# Altium PCB PMOD_Step.PcbDoc
Units mil, origin at the board's own origin, x right, y up, seen from the top; angles counter-clockwise.
Board outline 3150 x 1575 mil, 2 copper layers (Top Layer, Bottom Layer); 51 components, 35 nets, 140 pads, 14 vias.
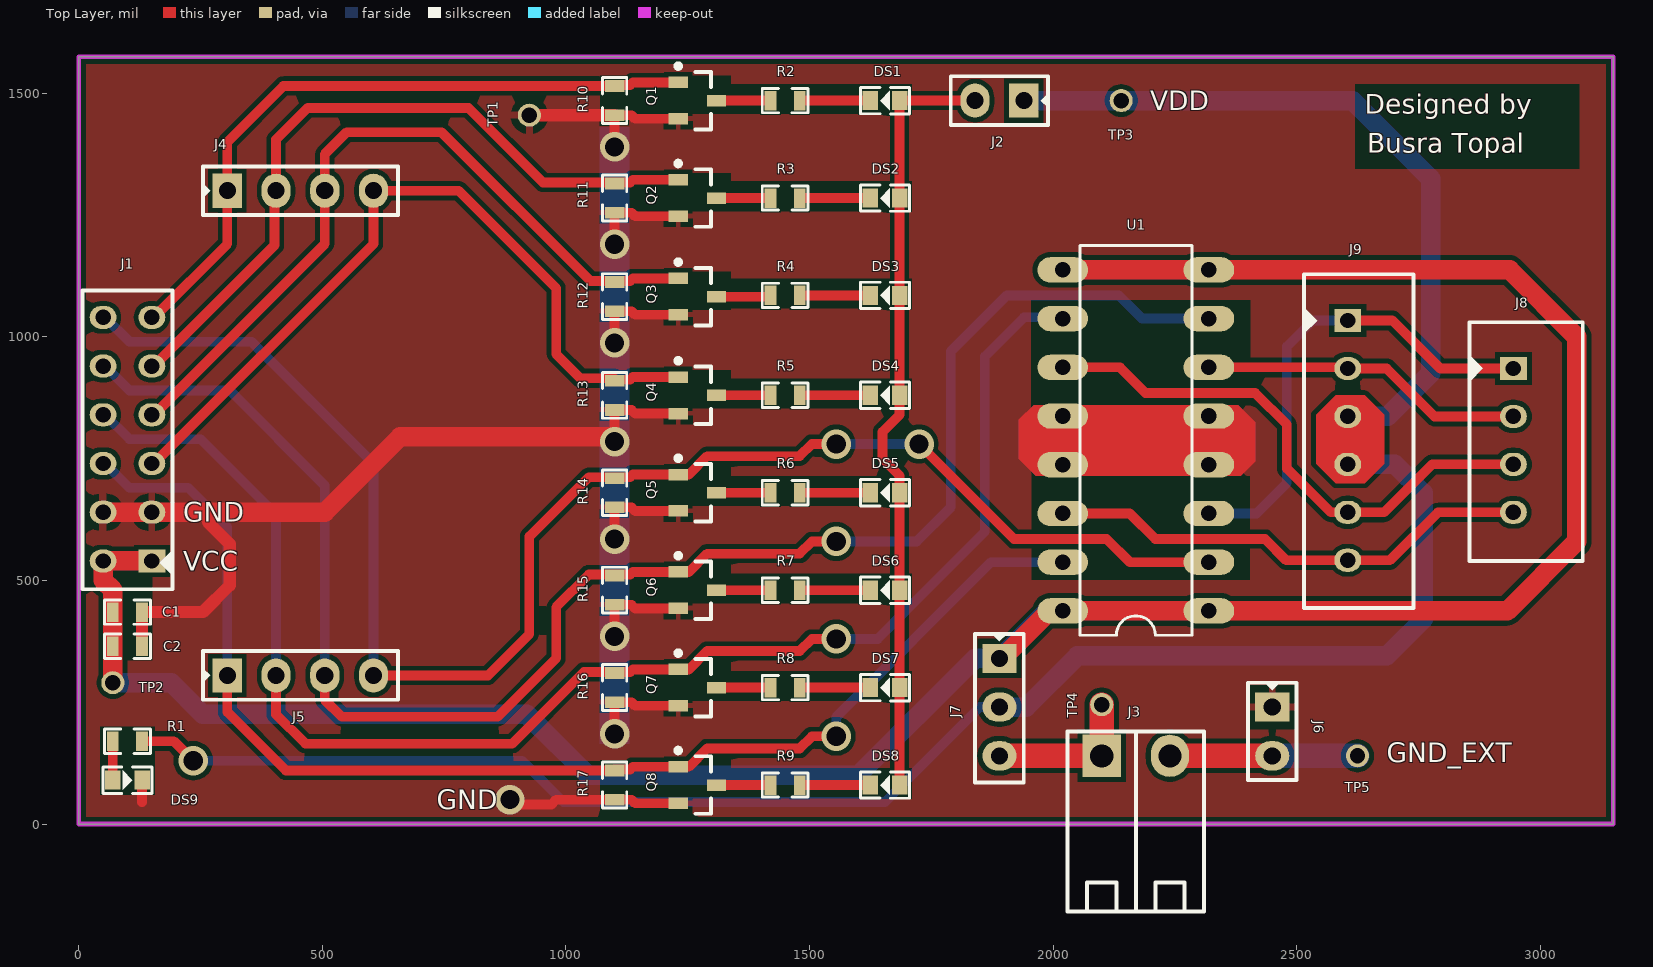
[diagram p0: Top Layer view]
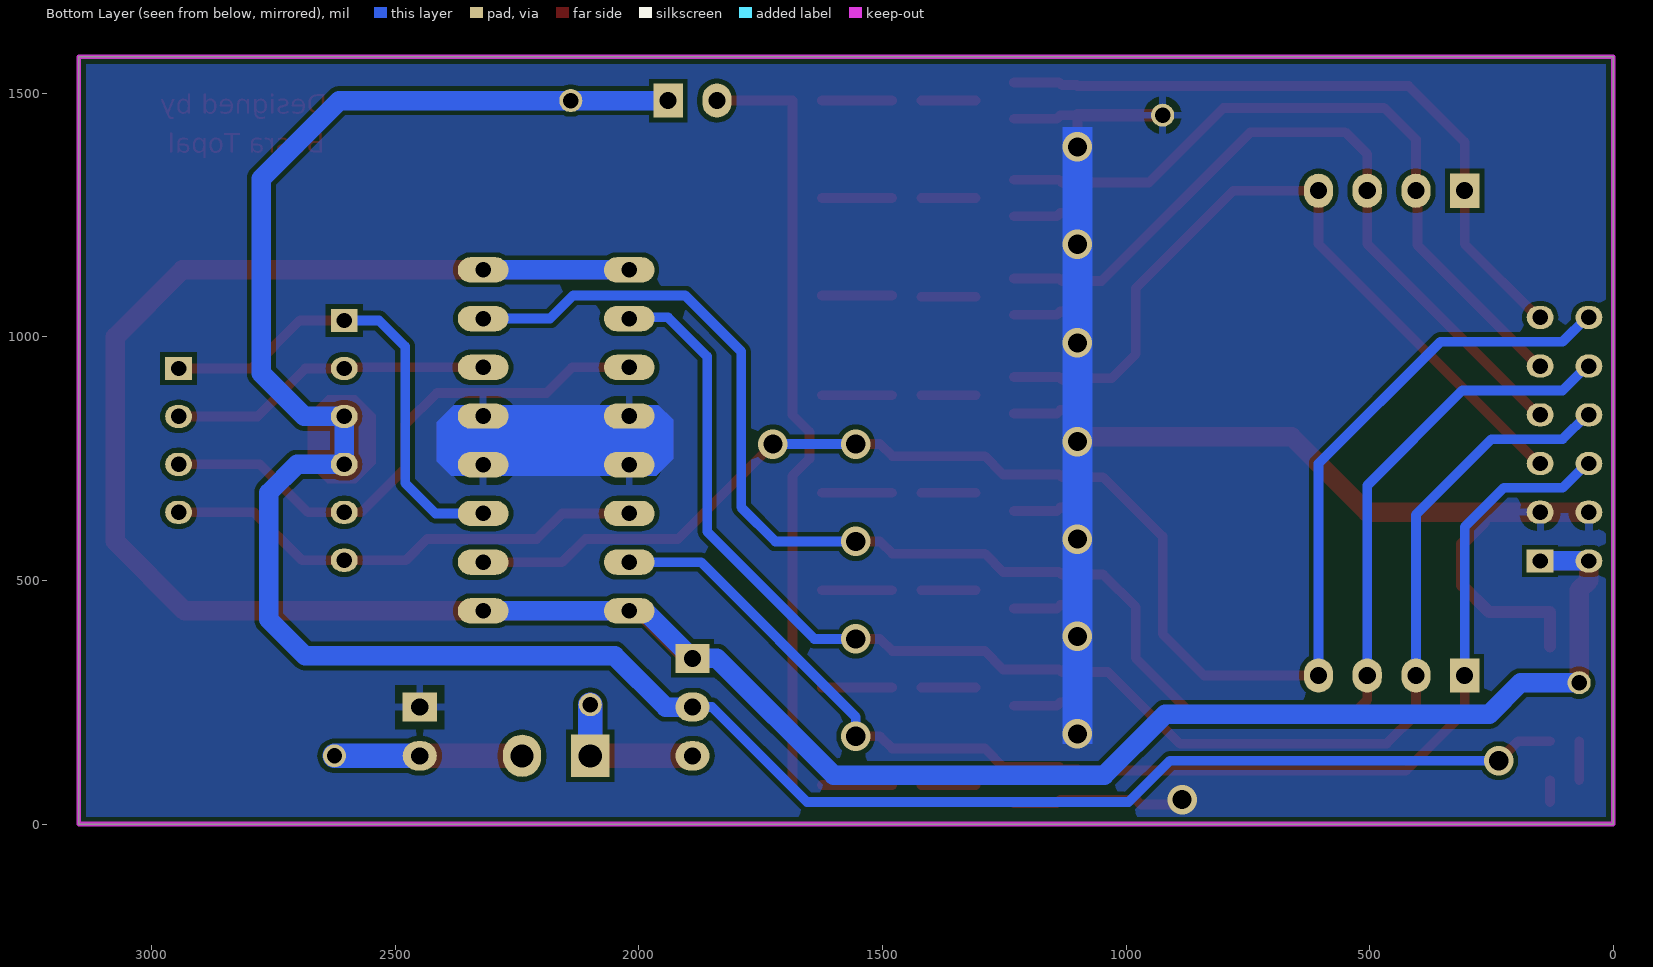
[diagram p1: Bottom Layer view, seen from below]
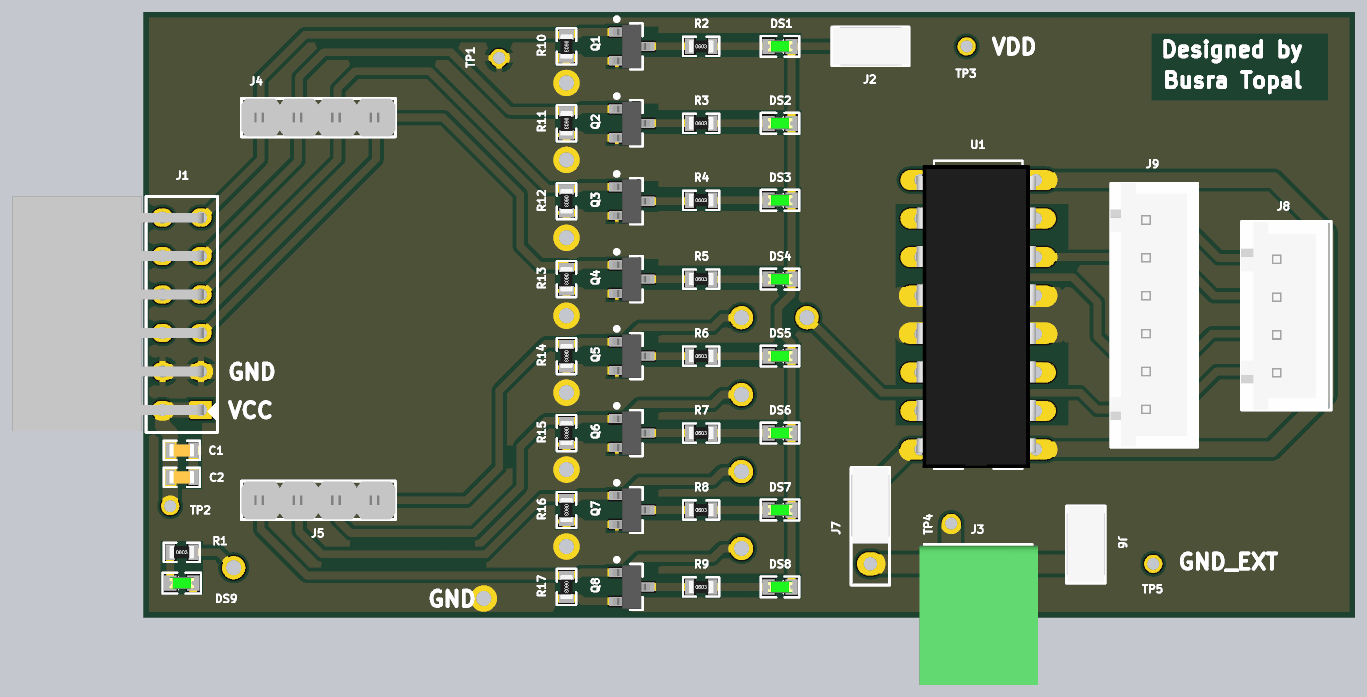
[diagram p2: 3D render of the assembled board from above, using the file's embedded part models]

## Layer stack, top to bottom
Top Solder: solder mask 0.4, Solder Resist, Dk 3.5
Top Layer: signal copper 1.4
Dielectric 1: dielectric 12.6, FR-4, Dk 4.8
Bottom Layer: signal copper 1.4
Bottom Solder: solder mask 0.4, Solder Resist, Dk 3.5

## Board outline
0,0 3150,0 3150,1575 0,1575

## Design rules (kind name [scope] priority, off if disabled: settings)
Clearance [All] p1: gap=10 ignorepadtopadclearanceinfootprint=FALSE except(0: Arc-Hole Track-Hole SMDPad-Hole THPad-Hole Via-Hole Fill-Hole Poly-Hole Region-Hole Text-Hole)
PolygonConnect [All] p1: thpad.connectstyle=Relief thpad.reliefconductorwidth=15 thpad.reliefentries=4 thpad.polygonreliefangle="90 Angle" thpad.airgapwidth=15 smdpad.connectstyle=Relief smdpad.reliefconductorwidth=10 smdpad.reliefentries=4 smdpad.polygonreliefangle="90 Angle" smdpad.airgapwidth=10 via.connectstyle=Direct via.reliefconductorwidth=10 via.reliefentries=4 via.polygonreliefangle="90 Angle" via.airgapwidth=10
RoutingVias [All] p1: holewidth=28 width=50 viastyle="Through Hole" minholewidth=28 minwidth=50 maxholewidth=78.74 maxwidth=100
SilkToSolderMaskClearance [IsPad] p1: minsilkscreentomaskgap=0 clearancetoexposedcopper=TRUE
SolderMaskExpansion [All] p1: expansion=4 istentingtop=FALSE
Width [All] p1: maxlimit=50 minlimit=10 preferedwidth=10 minimp=50.000000 maximp=50.000000 favimp=50.000000
29 further rules are at their usual default settings.

## Components (designator, comment, footprint, x,y, rotation, side; value= is the part's Value field where it differs from the comment)
C1 "CL10B104KB8NNNC" CAP-0603 100,435 r180 top value=100nF
C2 "CL10B103KB8NNNC" CAP-0603 100,365 r180 top value=10nF
DS1 "SMD Green Led" LED_SMD_0603G 1655,1485 r180 top value=LTST-C193KGKT-5A
DS2 "SMD Green Led" LED_SMD_0603G 1655,1285 r180 top value=LTST-C193KGKT-5A
DS3 "SMD Green Led" LED_SMD_0603G 1655,1085 r180 top value=LTST-C193KGKT-5A
DS4 "SMD Green Led" LED_SMD_0603G 1655,880 r180 top value=LTST-C193KGKT-5A
DS5 "SMD Green Led" LED_SMD_0603G 1655,680 r180 top value=LTST-C193KGKT-5A
DS6 "SMD Green Led" LED_SMD_0603G 1655,480 r180 top value=LTST-C193KGKT-5A
DS7 "SMD Green Led" LED_SMD_0603G 1655,280 r180 top value=LTST-C193KGKT-5A
DS8 "SMD Green Led" LED_SMD_0603G 1655,80 r180 top value=LTST-C193KGKT-5A
DS9 "SMD Green Led" LED_SMD_0603G 100,90 r0 top value=LTST-C193KGKT-5A
J1 "A-BL254-DA-G12D" CON-PMOD-FEMALE-2X6 100,790 r90 top
J2 "2.54mm-Jumper" CON-JUMPER-2.54-2L 1940,1485 r180 top
J3 "15EDGRC-3.5/2P" 15EDGRC-3.5-2 2030,-180 r0 top
J4 "2.54mm-STD-M-1x4" CON-HDR-M-2.54-1x4 305,1300 r0 top
J5 "2.54mm-STD-M-1x4" CON-HDR-M-2.54-1x4 305,305 r0 top
J6 "2.54mm-Jumper" CON-JUMPER-2.54-2L 2450,240 r270 top
J7 "2.54mm-Jumper" CON-JUMPER-2.54-3L 1890,340 r270 top
J8 "L-KLS1-XL5-2.50-04-R1" CON-JST-XH-2.50-4PIN 2945,787.5 r270 top
J9 "L-KLS1-XL5-2.50-06-R1" CON-JST-XH-2.50-6PIN 2605,787.5 r270 top
Q1 "2N7002K" SOT23_L 1270,1485 r0 top value=IRLML2502
Q2 "2N7002K" SOT23_L 1270,1285 r0 top value=IRLML2502
Q3 "2N7002K" SOT23_L 1270,1082.6 r0 top value=IRLML2502
Q4 "2N7002K" SOT23_L 1270,880 r0 top value=IRLML2502
Q5 "2N7002K" SOT23_L 1270,680 r0 top value=IRLML2502
Q6 "2N7002K" SOT23_L 1270,480 r0 top value=IRLML2502
Q7 "2N7002K" SOT23_L 1270,280 r0 top value=IRLML2502
Q8 "2N7002K" SOT23_L 1270,80 r0 top value=IRLML2502
R1 "RC0603FR-131K5L" RES-0603 100,170 r0 top value=1K5
R2 "RC0603FR-131K5L" RES-0603 1450,1485 r0 top value=1K5
R3 "RC0603FR-131K5L" RES-0603 1450,1285 r0 top value=1K5
R4 "RC0603FR-131K5L" RES-0603 1450,1085 r0 top value=1K5
R5 "RC0603FR-131K5L" RES-0603 1450,880 r0 top value=1K5
R6 "RC0603FR-131K5L" RES-0603 1450,680 r0 top value=1K5
R7 "RC0603FR-131K5L" RES-0603 1450,480 r0 top value=1K5
R8 "RC0603FR-131K5L" RES-0603 1450,280 r0 top value=1K5
R9 "RC0603FR-131K5L" RES-0603 1450,80 r0 top value=1K5
R10 "RC0603FR-1310KL" RES-0603 1100,1485 r270 top value=10K
R11 "RC0603FR-1310KL" RES-0603 1100,1285 r270 top value=10K
R12 "RC0603FR-1310KL" RES-0603 1100,1082.6 r270 top value=10K
R13 "RC0603FR-1310KL" RES-0603 1100,880 r270 top value=10K
R14 "RC0603FR-1310KL" RES-0603 1100,680 r270 top value=10K
R15 "RC0603FR-1310KL" RES-0603 1100,480 r270 top value=10K
R16 "RC0603FR-1310KL" RES-0603 1100,280 r270 top value=10K
R17 "RC0603FR-1310KL" RES-0603 1100,80 r270 top value=10K
TP1 "TP" TP_TH 925,1455 r180 top
TP2 "TP" TP_TH 70,290 r180 top
TP3 "TP" TP_TH 2140,1485 r180 top
TP4 "TP" TP_TH 2100,245 r180 top
TP5 "TP" TP_TH 2625,140 r90 top
U1 "L293D" PDIP-16 2170,787.5 r90 top

## Footprints (in the part's own frame and the unit in brackets; to place one, negate y for a bottom-side part, rotate by r counter-clockwise, add the part's x,y. Pads: shape width x height; smd on the part's side, far side on the other; paste and mask are expansions set on the pad)
15EDGRC-3.5-2 [mm] "Connector"
  rect 2x2.2 hole 1.2: 1(1.778,8.128)
  oval 2x2.2 hole 1.2: 2(5.334,8.128)
  silkscreen extent 0,0 7.11,9.4, body extent -0.31,0.13 7.49,9.33, height 7.2
CAP-0603 [mil]
  rect 24x40 smd: 1(-30,0) 2(30,0)
  silkscreen extent -47,-25 47,25, body extent -37,-16 37,16, height 32
CON-HDR-M-2.54-1x4 [mil] "Header; 2.54mm; Male; 1x4"
  rect 60x70 hole 35: 1(0,0)
  oval 60x70 hole 35: 2(100,0) 3(200,0) 4(300,0)
  silkscreen extent -50,-50 350,50, body extent -50,-49 350,49, height 370
CON-JST-XH-2.50-4PIN [mm] "Connector"
  rect 1.2x1.4 hole 0.8: 1(-3.75,0)
  oval 1.2x1.4 hole 0.8: 2(-1.25,0) 3(1.25,0) 4(3.75,0)
  silkscreen extent -6.16,-2.29 6.28,3.62, body extent -6.12,-2.32 6.28,3.43, height 7.25
CON-JST-XH-2.50-6PIN [mm] "Connector"
  rect 1.2x1.4 hole 0.8: 1(-6.25,0)
  oval 1.2x1.4 hole 0.8: 2(-3.75,0) 3(-1.25,0) 4(1.25,0) 5(3.75,0) 6(6.25,0)
  silkscreen extent -8.66,-2.29 8.74,3.43, body extent -8.7,-2.32 8.7,3.43, height 7.25
CON-JUMPER-2.54-2L [mil] "Jumper; Header; 2 Pos"
  rect 60x70 hole 35: 1(0,0)
  oval 60x70 hole 35: 2(100,0)
  silkscreen extent -50,-50 150,50, body extent -50,-50 147,50, height 374
CON-JUMPER-2.54-3L [mil] "Jumper; Header; 3 Pos"
  rect 60x70 hole 35: 1(0,0)
  oval 60x70 hole 35: 2(100,0) 3(200,0)
  silkscreen extent -50,-50 255,50, body extent -50,-50 147,50, height 374
CON-PMOD-FEMALE-2X6 [mm] "Connector"
  rect 1.2x1.4 hole 0.8: 1(-6.35,-1.27)
  oval 1.2x1.4 hole 0.8: 2(-6.35,1.27) 3(-3.81,-1.27) 4(-3.81,1.27) 5(-1.27,-1.27) 6(-1.27,1.27) 7(1.27,-1.27) 8(1.27,1.27) 9(3.81,-1.27) 10(3.81,1.27) 11(6.35,-1.27) 12(6.35,1.27)
  silkscreen extent -7.83,-2.38 7.75,2.35, body extent -7.75,-1.43 7.75,11.17, height 5.55
LED_SMD_0603G [mm] "Surface Mount 0603 Green LED"
  rect 0.8x1 smd: 1(-0.762,0) 2(0.762,0)
  silkscreen extent -1.27,-0.69 1.27,0.69, body extent -0.81,-0.4 0.81,0.4, height 0.6
PDIP-16 [mil] "SOIC, 16-Leads, Body 10,30x7,50mm, Pitch 1,27mm, IPC Medium Density"
  oval 52x104 hole 32: 1(-350,-150) 2(-250,-150) 3(-150,-150) 4(-50,-150) 5(50,-150) 6(150,-150) 7(250,-150) 8(350,-150) 9(350,150) 10(250,150) 11(150,150) 12(50,150) 13(-50,150) 14(-150,150) 15(-250,150) 16(-350,150)
  silkscreen extent -400,-115 400,115, body extent -399,-150 389,160, height 211
RES-0603 [mil]
  rect 24x40 smd: 1(-30,0) 2(30,0)
  silkscreen extent -47,-25 47,25, body extent -32,-16 31,16, height 17
SOT23_L [mm] "SOT23, 3-Leads, Body 2.9x1.3mm, Pitch 0.95mm, Lead Span 2.3mm, IPC High Density"
  rect 1x0.6 smd: 1(-1,0.95) 2(-1,-0.95) 3(1,0)
  silkscreen extent -1.12,-1.5 0.7,1.92, body extent -1.27,-1.46 1.21,1.46, height 0.98
TP_TH [mm] "Test point footprint"
  round 1.2 hole 0.8: 0(0,0)

## Part data
C1: library part CAP-100N-0603, "CAP CER 0.1UF 50V 10% X7R 0603", Capacitance=0.1µF, Manufacturer="Samsung Electro-Mechanics America, Inc", Operating Temperature="-55°C ~ 125°C", Package / Case="0603 (1608 Metric)", Ratings=-, Supplier Part Number 1=1276-1000-2-ND, Temperature Coefficient=X7R, Tolerance=±10%, Voltage - Rated=50V, Applications="General Purpose", Category=Capacitors, ComponentLink1Description=http://www.samsungsem.com/servlet/FileDownload?type=spec&file=CL10B104KB8NNNC.pdf, ComponentLink1URL=http://www.samsungsem.com/servlet/FileDownload?type=spec&file=CL10B104KB8NNNC.pdf, Features=-, Height - Seated (Max)=-, Lead Spacing=-, Lead Style=-, Manufacturer Part Number=CL10B104KB8NNNC, Mounting Type="Surface Mount, MLCC", Packaging="Tape & Reel (TR)", Pricing 1="4000=0.00513, 8000=0.00468, 12000=0.00446, 28000=0.00424, 100000=0.00307 (USD)", RoHS="RoHS Compliant", Size / Dimension="0.063\" L x 0.031\" W (1.60mm x 0.80mm)", Stock 1=9364000, Supplier 1=Digi-Key, Thickness (Max)="0.035\" (0.90mm)"
C2: library part CAP-10N-0603, "CAP CER 10000PF 50V 10% X7R 0603", Capacitance=10000pF, Manufacturer="Samsung Electro-Mechanics America, Inc", Operating Temperature="-55°C ~ 125°C", Package / Case="0603 (1608 Metric)", Ratings=-, Supplier Part Number 1=1276-1009-2-ND, Temperature Coefficient=X7R, Tolerance=±10%, Voltage - Rated=50V, Applications="General Purpose", Category=Capacitors, ComponentLink1Description=http://www.samsungsem.com/servlet/FileDownload?type=spec&file=CL10B103KB8NNNC.pdf, ComponentLink1URL=http://www.samsungsem.com/servlet/FileDownload?type=spec&file=CL10B103KB8NNNC.pdf, Features=-, Height - Seated (Max)=-, Lead Spacing=-, Lead Style=-, Manufacturer Part Number=CL10B103KB8NNNC, Mounting Type="Surface Mount, MLCC", Packaging="Tape & Reel (TR)", Pricing 1="4000=0.00345, 8000=0.00315, 12000=0.003, 28000=0.00285, 100000=0.00206 (USD)", RoHS="RoHS Compliant", Size / Dimension="0.063\" L x 0.031\" W (1.60mm x 0.80mm)", Stock 1=504000, Supplier 1=Digi-Key, Thickness (Max)="0.035\" (0.90mm)"
DS1 DS2 DS3 DS4 DS5 DS6 DS7 DS8 DS9: library part LED-SMD-GRN, "LED GREEN CLEAR 0603 SMD", Color=Green, Current - Test=5mA, Lens Color=Colorless, Manufacturer="Lite-On Inc.", Manufacturer Part Number=LTST-C193KGKT-5A, Millicandela Rating=16.25mcd, Package / Case="0603 (1608 Metric)", Supplier Part Number 1=160-1828-1-ND, Voltage - Forward (Vf) (Typ)=2V, Category=Optoelectronics, ComponentLink1Description=http://optoelectronics.liteon.com/upload/download/DS22-2007-0094/S_110_LTST-C193KGKT-5A.pdf, ComponentLink1URL=http://optoelectronics.liteon.com/upload/download/DS22-2007-0094/S_110_LTST-C193KGKT-5A.pdf, Features=-, Height (Max)=0.35mm, Lens Style/Size="Rectangle with Flat Top, 1.15mm x 0.80mm", Lens Transparency=Clear, Mounting Type="Surface Mount", Packaging="Cut Tape (CT)", Part Status=Active, Pricing 1="1=0.41, 10=0.296, 25=0.2268, 100=0.148, 250=0.10852, 500=0.0921, 1000=0.07565 (USD)", RoHS="RoHS Compliant", Size / Dimension="1.60mm L x 0.80mm W", Stock 1=108152, Supplier 1=Digi-Key, Viewing Angle=130°, Wavelength - Dominant=572nm, Wavelength - Peak=574nm
J1: library part CON-PMOD-FEMALE-2X6, "2.54mm Standart Female PMOD Connector 2x6", Color=White, Manufacturer=ASSMANN, Operating Temperature="-40°C ~ 115°C", Category="Connectors, Interconnects", ComponentLink1Description=https://www.cvilux.com/uploads/spec/100/483/SPCI028.pdf, ComponentLink1URL=https://www.cvilux.com/uploads/spec/100/483/SPCI028.pdf, Header Orientation=Vertical, Manufacturer Part Number=A-BL254-DA-G12D, Mounting Type="Through Hole", Number of Levels=1, Number of Positions=2, Packaging=Bulk, Part Status=Active, Pitch="0.049\" (1.25mm)", Positions Per Level=2, RoHS="RoHS Compliant", Termination Style=Solder, Type="Header, Male Pins, Shrouded"
J2 J6: library part CON-JUMPER-2.54-2L, "2.54mm Male Straight 1x2 standard Header", Color=White, Manufacturer=KLS, Operating Temperature="-40°C ~ 115°C", Category="Connectors, Interconnects", ComponentLink1Description=https://www.cvilux.com/uploads/spec/100/483/SPCI028.pdf, ComponentLink1URL=https://www.cvilux.com/uploads/spec/100/483/SPCI028.pdf, Header Orientation=Vertical, Manufacturer Part Number=2.54mm-Jumper, Mounting Type="Through Hole", Number of Levels=1, Number of Positions=2, Packaging=Bulk, Part Status=Active, Pitch=2.54mm, Positions Per Level=2, RoHS="RoHS Compliant", Termination Style=Solder, Type="Header, Male Pins, Shrouded"
J3: library part 15EDGRC-3.5-02P, "Pluggable terminal block; socket; male; angled 90°; 3.5mm; ways:2", Manufacturer="DEGSON ELECTRONICS", Rated current=7A, Category="Terminal blocks PCB mount", ComponentLink1Description=http://www.tme.eu/en/details/15edgrc-3.5_2p/terminal-blocks-pcb-mount/degson-electronics/, ComponentLink1URL=http://www.tme.eu/en/details/15edgrc-3.5_2p/terminal-blocks-pcb-mount/degson-electronics/, Connector=socket, Connector type="pluggable terminal block", Contacts pitch=3.5mm, Electrical mounting=THT, Manufacturer Part Number=15EDGRC-3.5/2P, MinAmount=2, Multiples=1, Number of ways=2, Price Type=NET, Pricing 1="2=0,327, 25=0,165, 100=0,124, 500=0,116, 2000=0,101 (USD)", Spatial orientation="angled 90°", Stock 1=0, SuppliedAmount=2000, Supplier 1=TME, Supplier Part Number 1=15EDGRC-3.5/2P, Unit=pcs, Weight=0,472
J4 J5: library part CON-HDR-M-2.54-1x4, "2.54mm Male Straight 1x2 standard Header", Color=White, Manufacturer=KLS, Operating Temperature="-40°C ~ 115°C", Category="Connectors, Interconnects", ComponentLink1Description=https://www.cvilux.com/uploads/spec/100/483/SPCI028.pdf, ComponentLink1URL=https://www.cvilux.com/uploads/spec/100/483/SPCI028.pdf, Header Orientation=Vertical, Manufacturer Part Number=2.54mm-STD-M-1x4, Mounting Type="Through Hole", Number of Levels=1, Number of Positions=4, Packaging=Bulk, Part Status=Active, Pitch=2.54mm, Positions Per Level=4, RoHS="RoHS Compliant", Termination Style=Solder, Type="Header, Male Pins, Shrouded"
J7: library part CON-JUMPER-2.54-3L, "2.54mm Male Straight 1x2 standard Header", Color=White, Manufacturer=KLS, Operating Temperature="-40°C ~ 115°C", Category="Connectors, Interconnects", ComponentLink1Description=https://www.cvilux.com/uploads/spec/100/483/SPCI028.pdf, ComponentLink1URL=https://www.cvilux.com/uploads/spec/100/483/SPCI028.pdf, Header Orientation=Vertical, Manufacturer Part Number=2.54mm-Jumper, Mounting Type="Through Hole", Number of Levels=1, Number of Positions=3, Packaging=Bulk, Part Status=Active, Pitch=2.54mm, Positions Per Level=3, RoHS="RoHS Compliant", Termination Style=Solder, Type="Header, Male Pins, Shrouded"
J8: library part CON-JST-XH-4PIN, "2.50mm JST-XH 4 Pin Male Connector", Color=White, Manufacturer="KLS Electronics", Operating Temperature="-40°C ~ 115°C", Category="Connectors, Interconnects", ComponentLink1Description=https://www.cvilux.com/uploads/spec/100/483/SPCI028.pdf, ComponentLink1URL=https://www.cvilux.com/uploads/spec/100/483/SPCI028.pdf, Header Orientation=Vertical, Manufacturer Part Number=L-KLS1-XL5-2.50-04-R1, Mounting Type="Through Hole", Number of Levels=1, Number of Positions=4, Packaging=Bulk, Part Status=Active, Pitch=2.50mm, Positions Per Level=4, RoHS="RoHS Compliant", Termination Style=Solder, Type="Header, Male Pins, Shrouded"
J9: library part CON-JST-XH-6PIN, "2.50mm JST-XH 6 Pin Male Connector", Color=White, Manufacturer="KLS Electronics", Operating Temperature="-40°C ~ 115°C", Category="Connectors, Interconnects", ComponentLink1Description=https://www.cvilux.com/uploads/spec/100/483/SPCI028.pdf, ComponentLink1URL=https://www.cvilux.com/uploads/spec/100/483/SPCI028.pdf, Header Orientation=Vertical, Manufacturer Part Number=L-KLS1-XL5-2.50-06-R1, Mounting Type="Through Hole", Number of Levels=1, Number of Positions=6, Packaging=Bulk, Part Status=Active, Pitch=2.50mm, Positions Per Level=6, RoHS="RoHS Compliant", Termination Style=Solder, Type="Header, Male Pins, Shrouded"
Q1 Q2 Q3 Q4 Q5 Q6 Q7 Q8: library part TRQ-IRLML2502, "MOSFET N-CH 20V 4.2A SOT23", Current - Continuous Drain (Id) @ 25°C="4.2A (Ta)", Drain to Source Voltage (Vdss)="20 V", Manufacturer="Infineon Technologies", Package / Case="TO-236-3, SC-59, SOT-23-3", Power - Max=350mW, Supplier Device Package=SOT-23, Supplier Part Number 1=9102981, Input Capacitance (Ciss) @ Vds="50pF @ 25V", Category="Discrete Semiconductor Products", ComponentLink1Description=http://www.fairchildsemi.com/ds/2N/2N7002K.pdf, ComponentLink1URL=http://www.fairchildsemi.com/ds/2N/2N7002K.pdf, FET Feature="Logic Level Gate", FET Type="MOSFET N-Channel, Metal Oxide", Gate Charge (Qg) @ Vgs="12 nC @ 5 V", Manufacturer Part Number=2N7002K, Mounting Type="Surface Mount", Packaging="Tape & Reel (TR)", Pricing 1="3000=0.046, 6000=0.04, 15000=0.034, 30000=0.032, 75000=0.03, 150000=0.026 (USD)", Rds On (Max) @ Id, Vgs="45mOhm @ 4.2A, 4.5V", RoHS="RoHS Compliant", Stock 1=36000, Supplier 1=Farnell, Vgs(th) (Max) @ Id="1.2V @ 250µA"
R1 R2 R3 R4 R5 R6 R7 R8 R9: library part RES-1K5-0603, "RES 1.5K OHM 1% 1/10W 0603", Manufacturer=YAGEO, Operating Temperature="-55°C ~ 155°C", Package / Case="0603 (1608 Metric)", Power (Watts)="0.1W, 1/10W", Resistance (Ohms)="1.5 kOhms", Supplier Device Package=0603, Temperature Coefficient=±200ppm/°C, Tolerance=±1%, Category=Resistors, ComponentLink1Description=http://www.vishay.com/docs/20043/crcwhpe3.pdf, ComponentLink1URL=http://www.vishay.com/docs/20043/crcwhpe3.pdf, Composition="Thick Film", Failure Rate=-, Features="Automotive AEC-Q200", Height - Seated (Max)="0.022\" (0.55mm)", Manufacturer Part Number=RC0603FR-131K5L, Number of Terminations=2, Packaging="Cut Tape (CT)", Part Status=Active, Pricing 1="1=0.23, 10=0.194, 25=0.1408, 50=0.102, 100=0.0757, 250=0.05808, 500=0.04576, 1000=0.03168, 2500=0.02904 (USD)", RoHS=-, Size / Dimension="0.063\" L x 0.031\" W (1.60mm x 0.80mm)", Stock 1=151894, Supplier 1=Avnet, Supplier Part Number 1=RC0603FR-131K5L
R10 R11 R12 R13 R14 R15 R16 R17: library part RES-10K-0603, "RES 10K OHM 1% 1/10W 0603", Manufacturer=YAGEO, Operating Temperature="-55°C ~ 155°C", Package / Case="0603 (1608 Metric)", Power (Watts)="0.1W, 1/10W", Resistance (Ohms)="10 kOhms", Supplier Device Package=0603, Supplier Part Number 1=4510020, Temperature Coefficient=±100ppm/°C, Tolerance=±1%, Category=Resistors, ComponentLink1Description=http://www.vishay.com/docs/20043/crcwhpe3.pdf, ComponentLink1URL=http://www.vishay.com/docs/20043/crcwhpe3.pdf, Composition="Thick Film", Failure Rate=-, Features=-, Height - Seated (Max)="0.022\" (0.55mm)", Manufacturer Part Number=RC0603FR-1310KL, Number of Terminations=2, Packaging="Cut Tape (CT)", Part Status=Active, Pricing 1="1=0.23, 10=0.194, 25=0.1408, 50=0.102, 100=0.0757, 250=0.05808, 500=0.04576, 1000=0.03168, 2500=0.02904 (USD)", RoHS=-, Size / Dimension="0.063\" L x 0.031\" W (1.60mm x 0.80mm)", Stock 1=151894, Supplier 1="Future Electronics"
TP1 TP2 TP3 TP4 TP5: "Test Point", ClassName="Test Points", Published=25-Oct-2009, Publisher=tmk
U1: library part IC-L293D-PDIP, "IC MTR DRV BIPOLR 4.5-36V 20SOIC", Supplier Part Number 1=511-L293D, Supplier 1=Mouser

## Via types
v1: diameter 60.63, hole 39.37, Top Layer to Bottom Layer, 14 vias

## Nets (pads, with @x,y where several pads share a name; then routed paths per layer and width w, separated by ;. In a path a pad name is that pad's centre, name@x,y a point inside that pad or via, vN(x,y) a via of type N, cw(c..) or ccw(c..) an arc to the next point about the centre after c; other vN are vias at no path point)
GND: C1.1 C2.1 DS9.2 J1.3 J1.4 J6.1 Q1.2 Q2.2 Q3.2 Q4.2 Q5.2 Q6.2 Q7.2 Q8.2 R10.2 R11.2 R12.2 R13.2 R14.2 R15.2 R16.2 R17.2 TP1.0 U1.4 U1.5 U1.12 U1.13 | length 3456.4
  Top Layer w20: 130,45 DS9.2 ; v1(885,50) 885,45 890,40 970,40 980,50 R17.2 1135,50 1142.4,42.6 Q8.2 ; v1@1100,195 R16.2 1135,250 1142.4,242.6 Q7.2 ; v1@1100,395 R15.2 1135,450 1142.4,442.6 Q6.2 ; v1@1100,595 R14.2 1135,650 1142.4,642.6 Q5.2 ; v1@1100,795 R13.2 1135,850 1142.4,842.6 Q4.2 ; v1@1100,997.6 R12.2 1135,1052.6 1142.4,1045.2 Q3.2 ; v1@1100,1200 R11.2 1135,1255 1142.4,1247.6 Q2.2 ; v1@1100,1400 R10.2 1135,1455 1142.4,1447.6 Q1.2
  Top Layer w25: C2.1 C1.1 255,435 310,490 310,575 265,620 265,640 ; TP1.0 R10.2
  Top Layer w40: J1.4 J1.3 265,640 505,640 660,795 v1@1100,795
  other v1: 1100,185 1100,385 1100,585 1100,785 1100,987.6 1100,1190 1100,1390
GND_EXT: J3.2 J6.2 TP5.0 | length 385
  Top Layer w50: J3.2 J6.2
  Bottom Layer w50: J6.2 TP5.0
mSig1: J8.1 J9.1 U1.3 | length 993.8
  Top Layer w20: J9.1 2696.44,1033.56 2794.86,935.14 J8.1
  Bottom Layer w20: U1.3 2417.5,637.5 2480,700 2480,980 2533.56,1033.56 J9.1
mSig2: J8.2 J9.2 U1.6 | length 666.7
  Top Layer w20: U1.6 2602.64,937.5 J9.2 2684.86,935.14 2783.29,836.71 J8.2
mSig3: J8.3 J9.5 U1.11 | length 1141.8
  Top Layer w20: U1.11 2137.5,937.5 2190,885 2415,885 2480,820 2480,730 2570.14,639.86 J9.5 2679.86,639.86 2778.29,738.29 J8.3
mSig4: J8.4 J9.6 U1.14 | length 1005.6
  Top Layer w20: U1.14 2157.5,637.5 2210,585 2435,585 2478.56,541.44 J9.6 2691.44,541.44 2789.86,639.86 J8.4
NetDS1_1: DS1.1 DS2.1 DS3.1 DS4.1 DS5.1 DS6.1 DS7.1 DS8.1 J2.2 | length 1589
  Top Layer w20: DS8.1 DS7.1 DS6.1 DS5.1 1685,715 1650,750 1650,805 1685,840 DS4.1 DS3.1 DS2.1 DS1.1 J2.2
NetDS1_2: DS1.2 R2.2 | length 145
  Top Layer w20: R2.2 DS1.2
NetDS2_2: DS2.2 R3.2 | length 145
  Top Layer w20: R3.2 DS2.2
NetDS3_2: DS3.2 R4.2 | length 145
  Top Layer w20: R4.2 DS3.2
NetDS4_2: DS4.2 R5.2 | length 145
  Top Layer w20: R5.2 DS4.2
NetDS5_2: DS5.2 R6.2 | length 145
  Top Layer w20: R6.2 DS5.2
NetDS6_2: DS6.2 R7.2 | length 145
  Top Layer w20: R7.2 DS6.2
NetDS7_2: DS7.2 R8.2 | length 145
  Top Layer w20: R8.2 DS7.2
NetDS8_2: DS8.2 R9.2 | length 145
  Top Layer w20: R9.2 DS8.2
NetDS9_1: DS9.1 R1.1 | length 80
  Top Layer w20: DS9.1 R1.1
NetQ1_3: Q1.3 R2.1 | length 110.6
  Top Layer w20: Q1.3 R2.1
NetQ2_3: Q2.3 R3.1 | length 110.6
  Top Layer w20: Q2.3 R3.1
NetQ3_3: Q3.3 R4.1 | length 110.6
  Top Layer w20: Q3.3 R4.1@1420,1082.6
NetQ4_3: Q4.3 R5.1 | length 110.6
  Top Layer w20: Q4.3 R5.1
NetQ5_3: Q5.3 R6.1 | length 110.6
  Top Layer w20: Q5.3 R6.1
NetQ6_3: Q6.3 R7.1 | length 110.6
  Top Layer w20: Q6.3 R7.1
NetQ7_3: Q7.3 R8.1 | length 110.6
  Top Layer w20: Q7.3 R8.1
NetQ8_3: Q8.3 R9.1 | length 110.6
  Top Layer w20: Q8.3 R9.1
Signal1: J1.11 J4.1 Q1.1 R10.1 | length 1402.8
  Top Layer w20: J1.11 153.94,1040 305,1191.06 J4.1 305,1400 420,1515 R10.1 1102,1517 1132,1517 1137.4,1522.4 Q1.1
Signal2: J1.9 J4.2 Q2.1 R11.1 | length 1491.1
  Top Layer w20: J1.9 153.94,940 401.97,1188.03 401.97,1296.97 J4.2 405,1405 470,1470 800,1470 953,1317 1100,1317 1132,1317 1137.4,1322.4 Q2.1
Signal3: J1.7 J4.3 Q3.1 R12.1 | length 1557.4
  Top Layer w20: J1.7 153.94,840 505,1191.06 J4.3 505,1375 550,1420 745,1420 1050.4,1114.6 1100,1114.6 1132,1114.6 1137.4,1120 Q3.1
Signal4: J1.5 J4.4 Q4.1 R13.1 | length 1618.4
  Top Layer w20: J1.5 153.94,740 605,1191.06 J4.4 780,1300 980,1100 980,965 1030,915 1099,915 1102,912 1132,912 1137.4,917.4 Q4.1
Signal5: J1.12 J5.4 Q5.1 R14.1 U1.2 | length 3243.6
  Top Layer w20: J5.4 840,305 925,390 925,590 1047,712 1100,712 1132,712 1137.4,717.4 Q5.1 1252.4,717.4 1290,755 1480,755 1505,780 v1(1555,780) ; v1(1725,780) 1920,585 2110,585 2157.5,537.5 U1.2
  Bottom Layer w20: J1.12 53.94,1040 103.94,990 355,990 605,740 J5.4 ; v1(1555,780) v1(1725,780)
Signal6: J1.10 J5.3 Q6.1 R15.1 U1.7 | length 3452.9
  Top Layer w20: J5.3 505,255 540,220 860,220 980,340 980,445 1047,512 1100,512 1132,512 1137.4,517.4 Q6.1 1252.4,517.4 1290,555 1480,555 1505,580 v1(1555,580)
  Bottom Layer w20: J1.10 53.94,940 103.94,890 310,890 505,695 J5.3 ; v1(1555,580) 1720,580 1790,650 1790,970 1905,1085 2135,1085 2182.5,1037.5 U1.7
Signal7: J1.8 J5.2 Q7.1 R16.1 U1.10 | length 3064.1
  Top Layer w20: J5.2 405,225 465,165 890,165 1037,312 1100,312 1132,312 1137.4,317.4 Q7.1 1252.4,317.4 1290,355 1480,355 1505,380 v1(1555,380)
  Bottom Layer w20: J1.8 53.94,840 103.94,790 250,790 405,635 J5.2 ; v1(1555,380) 1640,380 1860,600 1860,960 1940,1040 2017.5,1040 U1.10
Signal8: J1.6 J5.1 Q8.1 R17.1 U1.15 | length 2653.2
  Top Layer w20: J5.1 305,230 425,110 R17.1 ; R17.1@1100,112 1132,112 1137.4,117.4 Q8.1 1252.4,117.4 1290,155 1480,155 1505,180 v1(1555,180)
  Bottom Layer w20: J1.6 53.94,740 103.94,690 225,690 305,610 J5.1 ; v1(1555,180) 1555,220 1872.5,537.5 U1.15
V_EXT: J3.1 J7.3 TP4.0 | length 420
  Top Layer w50: J7.3 J3.1 TP4.0
  Bottom Layer w50: J3.1 TP4.0
VCC: C1.2 C2.2 J1.1 J1.2 J7.1 TP2.0 U1.1 U1.8 U1.9 U1.16 | length 6043.1
  Top Layer w40: TP2.0 C2.2 C1.2 70,480 50,500 J1.2 J1.1 ; J7.1 1895,340 1992.5,437.5 U1.16 U1.1 2932.5,437.5 3075,580 3075,1000 2937.5,1137.5 U1.8 U1.9
  Bottom Layer w40: J1.2 J1.1 ; TP2.0 190,290 255,225 920,225 1045,100 1600,100 1840,340 J7.1 1987.5,437.5 U1.16 U1.1 ; U1.9 U1.8
VDD: J2.1 J7.2 J9.3 J9.4 R1.2 TP3.0 | length 4882.5
  Top Layer w20: R1.2 195,170 v1(235,130)
  Bottom Layer w20: v1(235,130) 910,130 995,45 1655,45 1850,240 J7.2
  Bottom Layer w40: J7.2 1945,240 2050,345 2685,345 2760,420 2760,680 2701.71,738.29 J9.4 J9.3 2686.71,836.71 2775,925 2775,1325 2615,1485 J2.1

## Polygon pours and split planes (outlines as drawn)
GND on Bottom Layer "GND_TopLayer" (solid, remove dead copper, pour order 0): 0,0 3150,0 3150,1575 0,1575
GND on Top Layer "GND_TopLayer" (solid, remove dead copper, pour order 1): 0,0 3150,0 3150,1575 0,1575

## Keep-outs
Keep-Out Layer:
  the board outline again, w10

## Other copper
Top Layer:
  pour cut-out: 1339.06,52.32 1710.75,52.32 1710.75,115 1339.06,115
  pour cut-out: 1339.06,252.32 1710.75,252.32 1710.75,315 1339.06,315
  pour cut-out: 1339.06,452.32 1710.75,452.32 1710.75,515 1339.06,515
  pour cut-out: 1339.06,652.32 1710.75,652.32 1710.75,715 1339.06,715
  pour cut-out: 1339.06,852.32 1710.75,852.32 1710.75,915 1339.06,915
  pour cut-out: 1339.06,1057.32 1710.75,1057.32 1710.75,1120 1339.06,1120
  pour cut-out: 1339.06,1257.32 1710.75,1257.32 1710.75,1320 1339.06,1320
  pour cut-out: 1339.06,1457.32 1710.75,1457.32 1710.75,1520 1339.06,1520
  pour cut-out: 1070,132.1 1070,60 1120,60 1120,40 1165,40 1165,52.32 1339.06,52.32 1339.06,132.1
  pour cut-out: 1070,332.1 1070,260 1120,260 1120,240 1165,240 1165,252.32 1339.06,252.32 1339.06,332.1
  pour cut-out: 1070,532.1 1070,460 1120,460 1120,440 1165,440 1165,452.32 1339.06,452.32 1339.06,532.1
  pour cut-out: 1070,732.1 1070,660 1120,660 1120,640 1165,640 1165,652.32 1339.06,652.32 1339.06,732.1
  pour cut-out: 1070,932.1 1070,860 1120,860 1120,840 1165,840 1165,852.32 1339.06,852.32 1339.06,932.1
  pour cut-out: 1070,1134.69 1070,1062.6 1120,1062.6 1120,1042.6 1165,1042.6 1165,1054.92 1339.06,1054.92 1339.06,1134.69
  pour cut-out: 1070,1337 1070,1265 1120,1265 1120,1245 1165,1245 1165,1257.32 1339.06,1257.32 1339.06,1337
  pour cut-out: 1070,1537.1 1070,1465 1120,1465 1120,1445 1165,1445 1165,1457.32 1339.06,1457.32 1339.06,1537.1
  pour cut-out: 1955,1075 1955,860 2405,860 2405,1075
  pour cut-out: 1955,715 1955,500 2405,500 2405,715
  pour cut-out: 152,510 92.57,510 92.57,335 152,335
  pour cut-out: 44.25,60.32 155.75,60.32 155.75,200 44.25,200
  pour cut-out: 2620,1518.32 3079.86,1518.32 3079.86,1345 2620,1345
  region net GND: 1960,860 2380,860 2415,825 2415,745 2385,715 1965,715 1930,750 1930,830
  region net VDD: 2540,840 2580,880 2640,880 2680,840 2680,740 2640,700 2580,700 2540,740
  text "Designed by" at 2640,1458.33 h40
  text "Busra Topal" at 2645,1378.33 h40
Bottom Layer:
  region net GND: 1070,1430 1070,165 1130,165 1130,1430
  region net GND: 1960,860 2380,860 2415,825 2415,745 2385,715 1965,715 1930,750 1930,830

## Silkscreen, mask and mechanical layers (free items; w line width, h text height)
Top Overlay:
  text "VDD" at 2200,1465 h40
  text "Designed by" at 2640,1458.33 h40
  text "Busra Topal" at 2645,1378.33 h40
  text "GND" at 215,620 h40
  text "VCC" at 215,520 h40
  text "GND_EXT" at 2685,126.66 h40
  text "GND" at 735,30 h40